# Altium PCB ChronomePCBV2.PcbDoc (part 2 of 2)
Units mil, origin at the board's own origin, x right, y up, seen from the top; angles counter-clockwise.
Board outline 8700 x 8700 mil, 2 copper layers (Top Layer, Bottom Layer); 149 components, 168 nets, 771 pads, 312 vias.
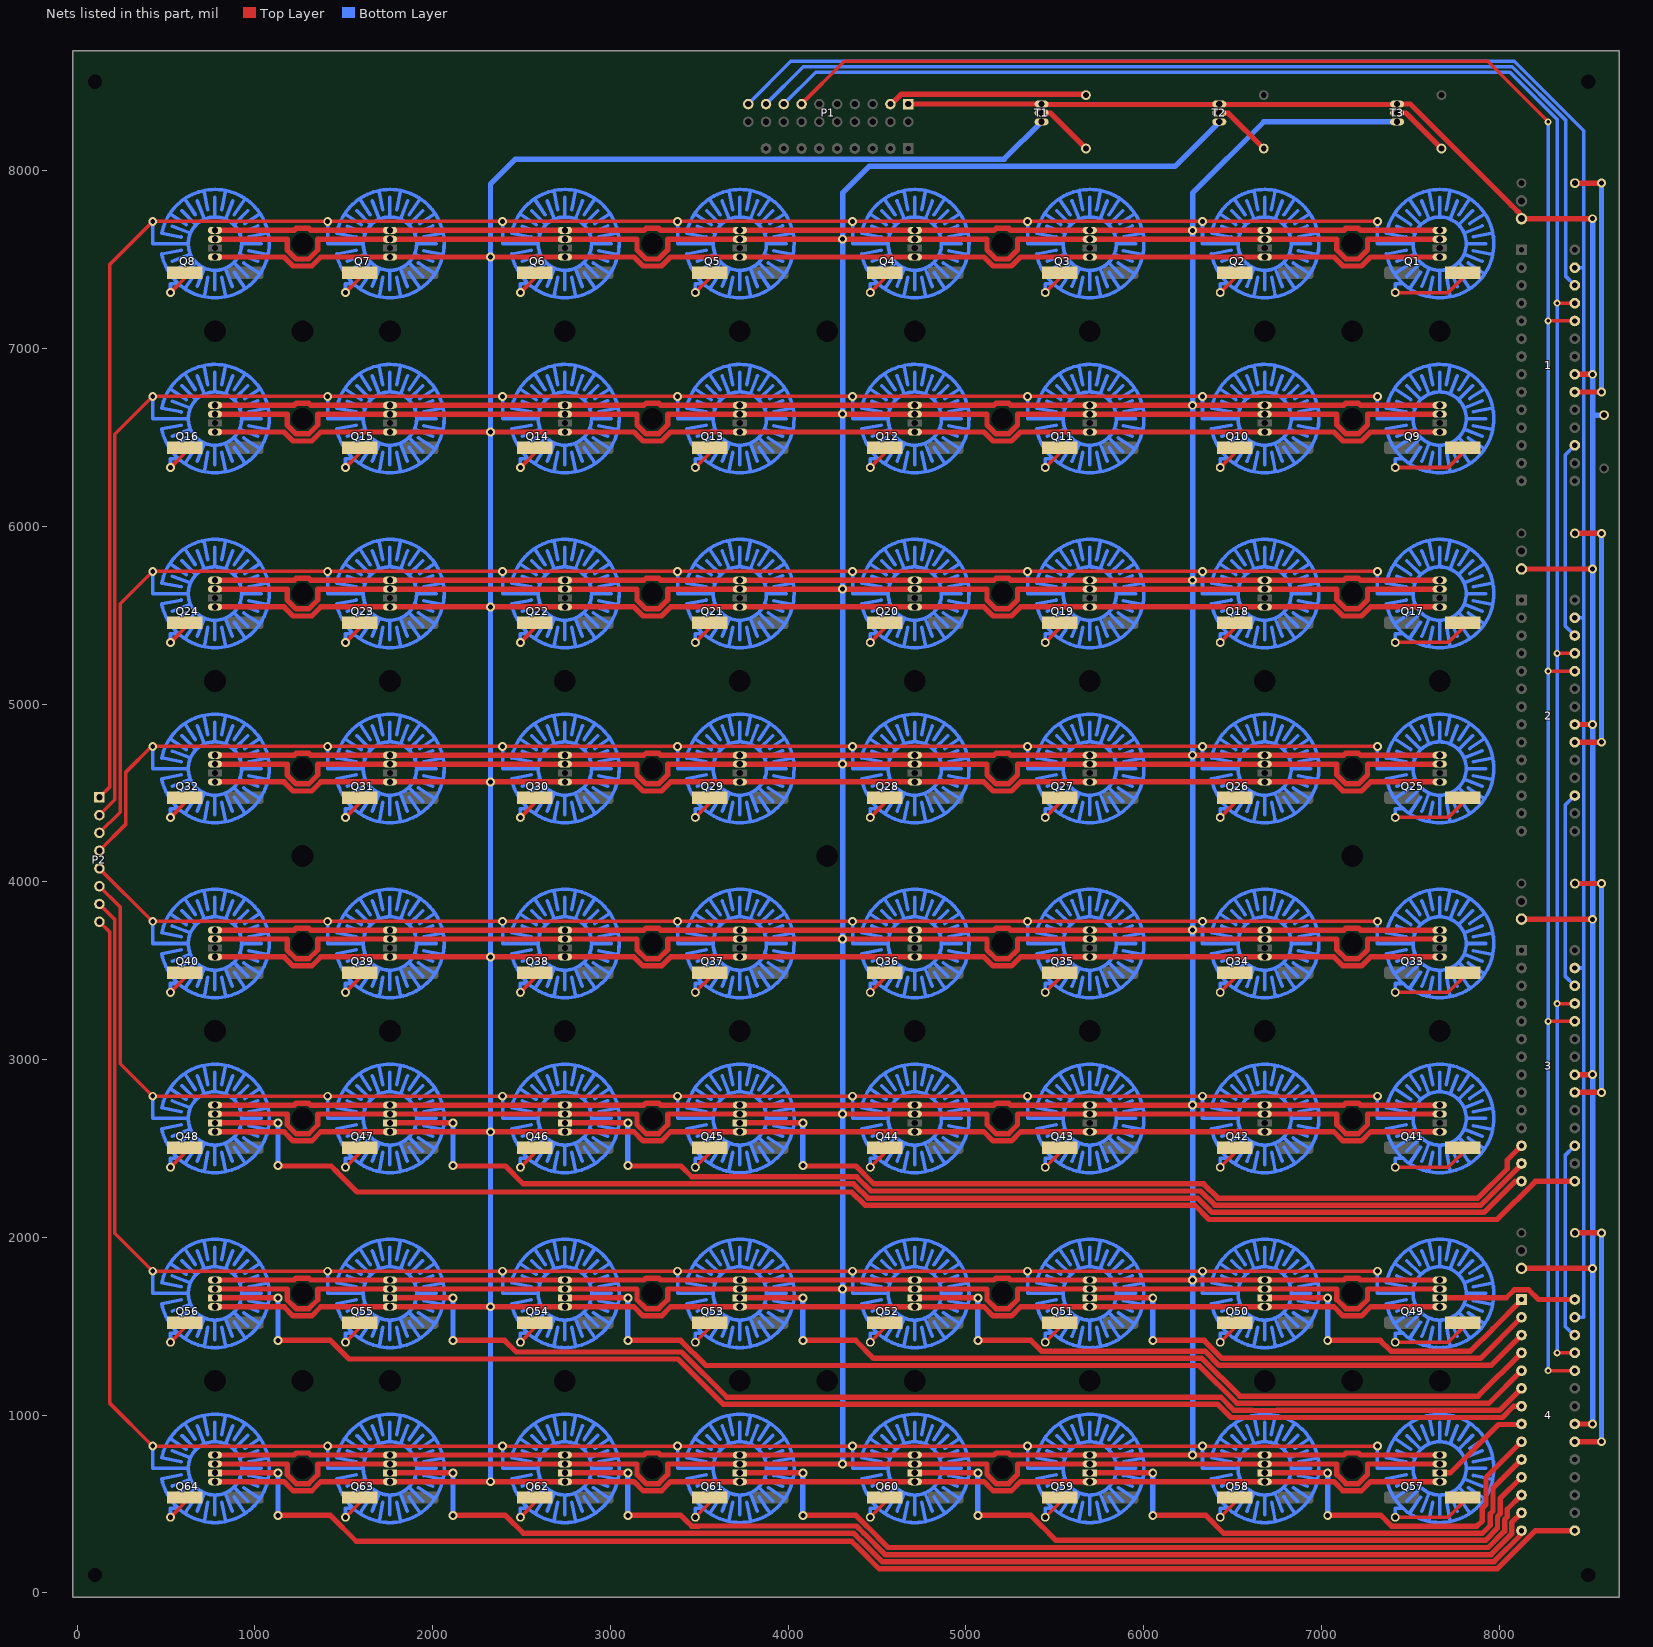
[diagram p2: the nets of this part, all layers, seen from the top]

## Via types
v1: diameter 50, hole 28, Top Layer to Bottom Layer, 292 vias
v2: diameter 40, hole 20, Top Layer to Bottom Layer, 20 vias

## Nets (pads, with @x,y where several pads share a name; then routed paths per layer and width w, separated by ;. In a path a pad name is that pad's centre, name@x,y a point inside that pad or via, vN(x,y) a via of type N, cw(c..) or ccw(c..) an arc to the next point about the centre after c; other vN are vias at no path point) (continued)
"LED GND 45": 3.12 Q45.1 | length 4862.9
  Top Layer w30: Q45.1@3727.76,2643.5 v1(4082.24,2643.5) ; v1@4082.24,2400.75 4381.06,2400.75 4481.3,2300.51 6336.66,2300.51 6416.66,2220.51 7880.51,2220.51 8045,2385 8045,2435 3.12@8125,2515
  Bottom Layer w30: v1(4082.24,2403.74) v1(4082.24,2643.5)
"LED GND 46": 3.13 Q46.1 | length 5813.5
  Top Layer w30: Q46.1@2743.5,2643.5 v1(3097.99,2643.5) ; v1@3097.99,2400.75 3396.81,2400.75 3457.05,2340.51 4384.73,2340.51 4464.73,2260.51 6320.1,2260.51 6400.1,2180.51 7897.08,2180.51 8125,2408.43 3.13@8125,2415
  Bottom Layer w30: v1(3097.99,2403.74) v1(3097.99,2643.5)
"LED GND 47": 3.14 Q47.1 | length 6785.6
  Top Layer w30: Q47.1@1759.25,2643.5 v1(2113.74,2643.5) ; v1@2113.74,2400.75 2409.25,2400.75 2509.49,2300.51 4368.16,2300.51 4448.16,2220.51 6303.53,2220.51 6383.53,2140.51 7913.65,2140.51 8088.14,2315 3.14@8125,2315
  Bottom Layer w30: v1(2113.74,2403.74) v1(2113.74,2643.5)
"LED GND 48": 3.15 Q48.1 | length 8102.6
  Top Layer w30: Q48.1@775,2643.5 v1(1129.49,2643.5) ; v1@1129.49,2400.75 1429.25,2400.75 1459.25,2370.75 ; 1459.25,2369.8 1574.05,2255 4357.1,2255 4431.59,2180.51 6286.96,2180.51 6366.96,2100.51 7988.29,2100.51 8202.78,2315 3.15@8425,2315
  Bottom Layer w30: v1(1129.49,2403.74) v1(1129.49,2643.5)
"LED GND 49": 4.28 Q49.1 | length 801.8
  Top Layer w30: Q49.1@7664.76,1659.76 8039.41,1659.76 8084.64,1705 8165.36,1705 8220.36,1650 4.28@8425,1650
"LED GND 50": 4.1 Q50.1 | length 1828.9
  Top Layer w30: Q50.1@6680.51,1659.25 v1(7035,1659.25) ; v1@7035,1420 7330,1420 7390.75,1359.25 7837.87,1359.25 7963.76,1485.15 7963.76,1485.66 4.1@8125,1646.9
  Bottom Layer w30: v1(7035,1419.49) v1(7035,1659.25)
"LED GND 51": 4.2 Q51.1 | length 2805.8
  Top Layer w30: Q51.1@5696.26,1659.25 v1(6050.75,1659.25) ; v1@6050.75,1420 6340,1420 6440.75,1319.25 7894.25,1319.25 4.2@8125,1550
  Bottom Layer w30: v1(6050.75,1419.49) v1(6050.75,1659.25)
"LED GND 52": 4.3 Q52.1 | length 3782.1
  Top Layer w30: Q52.1@4712.01,1659.25 v1(5066.5,1659.25) ; v1@5066.5,1420 5365.31,1420 5396.26,1389.05 5396.26,1388.54 5425.55,1359.25 6344.18,1359.25 6424.18,1279.25 7954.25,1279.25 4.3@8125,1450
  Bottom Layer w30: v1(5066.5,1419.49) v1(5066.5,1659.25)
"LED GND 53": 4.4 Q53.1 | length 4868.8
  Top Layer w30: Q53.1@3727.76,1659.25 v1(4082.24,1659.25) ; v1@4082.24,1420 4380,1420 4480.75,1319.25 6327.61,1319.25 6540.37,1106.49 6644.37,1106.49 6644.88,1105.98 6716.14,1105.98 6716.66,1106.49 7136.62,1106.49 7137.01,1106.1 7208.27,1106.1 7208.66,1106.49 7628.75,1106.49 7629.13,1106.1 7700.4,1106.1 7700.78,1106.49 7881.49,1106.49 4.4@8125,1350
  Bottom Layer w30: v1(4082.24,1419.49) v1(4082.24,1659.25)
"LED GND 54": 4.5 Q54.1 | length 5844.8
  Top Layer w30: Q54.1@2743.5,1659.25 v1(3097.99,1659.25) ; v1@3097.99,1420 3395,1420 3536.34,1278.66 6311.63,1278.66 6523.81,1066.49 6627.8,1066.49 6628.31,1065.98 6732.71,1065.98 6733.22,1066.49 7120.05,1066.49 7120.44,1066.1 7224.84,1066.1 7225.22,1066.49 7612.18,1066.49 7612.56,1066.1 7716.96,1066.1 7717.35,1066.49 7941.49,1066.49 4.5@8125,1250
  Bottom Layer w30: v1(3097.99,1419.49) v1(3097.99,1659.25)
"LED GND 55": 4.6 Q55.1 | length 6820.7
  Top Layer w30: Q55.1@1759.25,1659.25 v1(2113.74,1659.25) ; v1@2113.74,1420 2405,1420 2470,1355 3400,1355 3655,1100 6433.73,1100 6507.24,1026.49 6611.23,1026.49 6611.74,1025.98 6749.28,1025.98 6749.79,1026.49 7103.48,1026.49 7103.87,1026.1 7241.41,1026.1 7241.79,1026.49 7595.61,1026.49 7595.99,1026.1 7733.53,1026.1 7733.92,1026.49 8001.49,1026.49 4.6@8125,1150
  Bottom Layer w30: v1(2113.74,1419.49) v1(2113.74,1659.25)
"LED GND 56": 4.7 Q56.1 | length 7796.7
  Top Layer w30: Q56.1@775,1659.25 v1(1129.49,1659.25) ; v1@1129.49,1420 1425,1420 1530,1315 3380,1315 3635,1060 6417.16,1060 6490.67,986.49 6498.51,986.49 6594.66,986.49 6595.17,985.98 6765.85,985.98 6766.36,986.49 7086.91,986.49 7087.3,986.1 7257.98,986.1 7258.36,986.49 7579.04,986.49 7579.43,986.1 7750.1,986.1 7750.49,986.49 8018.06,986.49 8081.57,1050 4.7@8125,1050
  Bottom Layer w30: v1(1129.49,1419.49) v1(1129.49,1659.25)
"LED GND 57": 4.8 Q57.1 | length 569.2
  Top Layer w30: Q57.1@7664.76,675 7724.25,675 7995.74,946.49 4.8@8121.49,946.49
"LED GND 58": 4.9 Q58.1 | length 2038.5
  Top Layer w30: Q58.1@6680.51,675 v1(7035,675) ; v1@7035,435.75 7334.25,435.75 7364.76,405.24 7364.76,404.29 7394.05,375 7875,375 7905,405 7905,476.64 7925,496.64 7925,650 4.9@8125,850
  Bottom Layer w30: v1(7035,435.24) v1(7035,675)
"LED GND 59": 4.10 Q59.1 | length 2996.3
  Top Layer w30: Q59.1@5696.26,675 v1(6050.75,675) ; v1@6050.75,435.75 6349.05,435.75 6449.8,335 7904.94,335 7950,380.06 7950,444.71 7965,459.71 7965,590 4.10@8125,750
  Bottom Layer w30: v1(6050.75,435.24) v1(6050.75,675)
"LED GND 60": 4.11 Q60.1 | length 3947.2
  Top Layer w30: Q60.1@4712.01,675 v1(5066.5,675) ; v1@5066.5,435.75 5365.31,435.75 5396.26,404.8 5396.26,404.29 5425.55,375 5426.06,375 5506.06,295 7921.51,295 7990,363.49 7990,428.14 8005,443.14 8005,530 4.11@8125,650
  Bottom Layer w30: v1(5066.5,435.24) v1(5066.5,675)
"LED GND 61": 4.12 Q61.1 | length 4897.7
  Top Layer w30: Q61.1@3727.76,675 v1(4082.24,675) ; v1@4082.24,435.75 4381.06,435.75 4412.01,404.8 4412.01,404.29 4441.3,375 4441.81,375 4561.81,255 7938.08,255 8030,346.92 8030,411.57 8045,426.57 8045,470 4.12@8125,550
  Bottom Layer w30: v1(4082.24,435.24) v1(4082.24,675)
"LED GND 62": 4.13 Q62.1 | length 5848.6
  Top Layer w30: Q62.1@2743.5,675 v1(3097.99,675) ; v1@3097.99,435.75 3396.81,435.75 3427.76,404.8 3427.76,404.29 3457.05,375 3498.47,375 3498.98,375.51 4384.22,375.51 4424.73,335 4425.24,335 4545.24,215 7954.64,215 8070,330.36 8070,395 4.13@8125,450
  Bottom Layer w30: v1(3097.99,435.24) v1(3097.99,675)
"LED GND 63": 4.14 Q63.1 | length 6798.9
  Top Layer w30: Q63.1@1759.25,675 v1(2113.74,675) ; v1@2113.74,435.75 2409.25,435.75 2509.49,335.51 3439.97,335.51 3440.48,335 3515.03,335 3515.55,335.51 4367.65,335.51 4408.16,295 4408.67,295 4528.67,175 7971.21,175 8123.76,327.55 8123.76,330.63 8125,331.86 4.14@8125,350
  Bottom Layer w30: v1(2113.74,435.24) v1(2113.74,675)
"LED GND 64": 4.15 Q64.1 | length 8103.4
  Top Layer w30: Q64.1@775,675 v1(1129.49,675) ; v1@1129.49,435.75 1185,435.75 1424.25,435.75 1570,290 4356.59,290 4391.59,255 4392.1,255 4512.1,135 7987.78,135 8202.78,350 4.15@8425,350
  Bottom Layer w30: v1(1129.49,435.24) v1(1129.49,675)
Net1_17: 1.17 2.26 | length 1115.6
  Bottom Layer w20: 2.26@8425,5385 8370,5440 8370,6400 1.17@8425,6455
Net1_20: 1.20 R4.1 | length 1475
  Top Layer w30: 1.20@8425,6755 v1(8575,6755) ; R4.1@8425,7930 v1(8575,7930)
  Bottom Layer w30: v1(8575,6755) v1(8575,7930)
Net2_17: 2.17 3.26 | length 1115.6
  Bottom Layer w20: 3.26@8425,3415 8370,3470 8370,4430 2.17@8425,4485
Net2_20: 2.20 R5.1 | length 1475
  Top Layer w30: 2.20@8425,4785 v1(8575,4785) ; R5.1@8425,5960 v1(8575,5960)
  Bottom Layer w30: v1(8575,4785) v1(8575,5960)
Net3_17: 3.17 4.26 | length 1115.6
  Bottom Layer w20: 4.26@8425,1445 8370,1500 8370,2460 3.17@8425,2515
Net3_20: 3.20 R6.1 | length 1475
  Top Layer w30: 3.20@8425,2815 v1(8575,2815) ; R6.1@8425,3990 v1(8575,3990)
  Bottom Layer w30: v1(8575,2815) v1(8575,3990)
Net4_20: 4.20 R7.1 | length 1475
  Top Layer w30: 4.20@8425,850 v1(8575,850) ; R7.1@8425,2025 v1(8575,2025)
  Bottom Layer w30: v1(8575,850) v1(8575,2025)
NetD1_0: D1.0 Q1.Out | length 455.2
  Top Layer w20: Q1.Out@7414.76,7314.76 7713,7314.76 D1.0@7824,7425.76
NetD2_0: D2.0 Q2.Out | length 144.6
  Top Layer w20: Q2.Out@6430.51,7314.76 6511.51,7395.76 D2.0@6511.51,7425.76
NetD3_0: D3.0 Q3.Out | length 144.6
  Top Layer w20: Q3.Out@5446.26,7314.76 5527.26,7395.76 D3.0@5527.26,7425.76
NetD4_0: D4.0 Q4.Out | length 144.6
  Top Layer w20: Q4.Out@4462.01,7314.76 4543.01,7395.76 D4.0@4543.01,7425.76
NetD5_0: D5.0 Q5.Out | length 144.6
  Top Layer w20: Q5.Out@3477.76,7314.76 3558.76,7395.76 D5.0@3558.76,7425.76
NetD6_0: D6.0 Q6.Out | length 144.6
  Top Layer w20: Q6.Out@2493.5,7314.76 2574.5,7395.76 D6.0@2574.5,7425.76
NetD7_0: D7.0 Q7.Out | length 144.6
  Top Layer w20: Q7.Out@1509.25,7314.76 1590.25,7395.76 D7.0@1590.25,7425.76
NetD8_0: D8.0 Q8.Out | length 144.6
  Top Layer w20: Q8.Out@525,7314.76 606,7395.76 D8.0@606,7425.76
NetD9_0: D9.0 Q9.Out | length 455.2
  Top Layer w20: Q9.Out@7414.76,6330.51 7713,6330.51 D9.0@7824,6441.51
NetD10_0: D10.0 Q10.Out | length 144.6
  Top Layer w20: Q10.Out@6430.51,6330.51 6511.51,6411.51 D10.0@6511.51,6441.51
NetD11_0: D11.0 Q11.Out | length 144.6
  Top Layer w20: Q11.Out@5446.26,6330.51 5527.26,6411.51 D11.0@5527.26,6441.51
NetD12_0: D12.0 Q12.Out | length 144.6
  Top Layer w20: Q12.Out@4462.01,6330.51 4543.01,6411.51 D12.0@4543.01,6441.51
NetD13_0: D13.0 Q13.Out | length 144.6
  Top Layer w20: Q13.Out@3477.76,6330.51 3558.76,6411.51 D13.0@3558.76,6441.51
NetD14_0: D14.0 Q14.Out | length 144.6
  Top Layer w20: Q14.Out@2493.5,6330.51 2574.5,6411.51 D14.0@2574.5,6441.51
NetD15_0: D15.0 Q15.Out | length 144.6
  Top Layer w20: Q15.Out@1509.25,6330.51 1590.25,6411.51 D15.0@1590.25,6441.51
NetD16_0: D16.0 Q16.Out | length 144.6
  Top Layer w20: Q16.Out@525,6330.51 606,6411.51 D16.0@606,6441.51
NetD17_0: D17.0 Q17.Out | length 455.2
  Top Layer w20: Q17.Out@7414.76,5346.26 7713,5346.26 D17.0@7824,5457.26
NetD18_0: D18.0 Q18.Out | length 144.6
  Top Layer w20: Q18.Out@6430.51,5346.26 6511.51,5427.26 D18.0@6511.51,5457.26
NetD19_0: D19.0 Q19.Out | length 144.6
  Top Layer w20: Q19.Out@5446.26,5346.26 5527.26,5427.26 D19.0@5527.26,5457.26
NetD20_0: D20.0 Q20.Out | length 144.6
  Top Layer w20: Q20.Out@4462.01,5346.26 4543.01,5427.26 D20.0@4543.01,5457.26
NetD21_0: D21.0 Q21.Out | length 144.6
  Top Layer w20: Q21.Out@3477.76,5346.26 3558.76,5427.26 D21.0@3558.76,5457.26
NetD22_0: D22.0 Q22.Out | length 144.6
  Top Layer w20: Q22.Out@2493.5,5346.26 2574.5,5427.26 D22.0@2574.5,5457.26
NetD23_0: D23.0 Q23.Out | length 144.6
  Top Layer w20: Q23.Out@1509.25,5346.26 1590.25,5427.26 D23.0@1590.25,5457.26
NetD24_0: D24.0 Q24.Out | length 144.6
  Top Layer w20: Q24.Out@525,5346.26 606,5427.26 D24.0@606,5457.26
NetD25_0: D25.0 Q25.Out | length 455.2
  Top Layer w20: Q25.Out@7414.76,4362.01 7713,4362.01 D25.0@7824,4473.01
NetD26_0: D26.0 Q26.Out | length 144.6
  Top Layer w20: Q26.Out@6430.51,4362.01 6511.51,4443.01 D26.0@6511.51,4473.01
NetD27_0: D27.0 Q27.Out | length 144.6
  Top Layer w20: Q27.Out@5446.26,4362.01 5527.26,4443.01 D27.0@5527.26,4473.01
NetD28_0: D28.0 Q28.Out | length 144.6
  Top Layer w20: Q28.Out@4462.01,4362.01 4543.01,4443.01 D28.0@4543.01,4473.01
NetD29_0: D29.0 Q29.Out | length 144.6
  Top Layer w20: Q29.Out@3477.76,4362.01 3558.76,4443.01 D29.0@3558.76,4473.01
NetD30_0: D30.0 Q30.Out | length 144.6
  Top Layer w20: Q30.Out@2493.5,4362.01 2574.5,4443.01 D30.0@2574.5,4473.01
NetD31_0: D31.0 Q31.Out | length 144.6
  Top Layer w20: Q31.Out@1509.25,4362.01 1590.25,4443.01 D31.0@1590.25,4473.01
NetD32_0: D32.0 Q32.Out | length 144.6
  Top Layer w20: Q32.Out@525,4362.01 606,4443.01 D32.0@606,4473.01
NetD33_0: D33.0 Q33.Out | length 455.2
  Top Layer w20: Q33.Out@7414.76,3377.76 7713,3377.76 D33.0@7824,3488.76
NetD34_0: D34.0 Q34.Out | length 144.6
  Top Layer w20: Q34.Out@6430.51,3377.76 6511.51,3458.76 D34.0@6511.51,3488.76
NetD35_0: D35.0 Q35.Out | length 144.6
  Top Layer w20: Q35.Out@5446.26,3377.76 5527.26,3458.76 D35.0@5527.26,3488.76
NetD36_0: D36.0 Q36.Out | length 144.6
  Top Layer w20: Q36.Out@4462.01,3377.76 4543.01,3458.76 D36.0@4543.01,3488.76
NetD37_0: D37.0 Q37.Out | length 144.6
  Top Layer w20: Q37.Out@3477.76,3377.76 3558.76,3458.76 D37.0@3558.76,3488.76
NetD38_0: D38.0 Q38.Out | length 144.6
  Top Layer w20: Q38.Out@2493.5,3377.76 2574.5,3458.76 D38.0@2574.5,3488.76
NetD39_0: D39.0 Q39.Out | length 144.6
  Top Layer w20: Q39.Out@1509.25,3377.76 1590.25,3458.76 D39.0@1590.25,3488.76
NetD40_0: D40.0 Q40.Out | length 144.6
  Top Layer w20: Q40.Out@525,3377.76 606,3458.76 D40.0@606,3488.76
NetD41_0: D41.0 Q41.Out | length 455.2
  Top Layer w20: Q41.Out@7414.76,2393.5 7713,2393.5 D41.0@7824,2504.5
NetD42_0: D42.0 Q42.Out | length 144.6
  Top Layer w20: Q42.Out@6430.51,2393.5 6511.51,2474.5 D42.0@6511.51,2504.5
NetD43_0: D43.0 Q43.Out | length 144.6
  Top Layer w20: Q43.Out@5446.26,2393.5 5527.26,2474.5 D43.0@5527.26,2504.5
NetD44_0: D44.0 Q44.Out | length 144.6
  Top Layer w20: Q44.Out@4462.01,2393.5 4543.01,2474.5 D44.0@4543.01,2504.5
NetD45_0: D45.0 Q45.Out | length 144.6
  Top Layer w20: Q45.Out@3477.76,2393.5 3558.76,2474.5 D45.0@3558.76,2504.5
NetD46_0: D46.0 Q46.Out | length 144.6
  Top Layer w20: Q46.Out@2493.5,2393.5 2574.5,2474.5 D46.0@2574.5,2504.5
NetD47_0: D47.0 Q47.Out | length 144.6
  Top Layer w20: Q47.Out@1509.25,2393.5 1590.25,2474.5 D47.0@1590.25,2504.5
NetD48_0: D48.0 Q48.Out | length 144.6
  Top Layer w20: Q48.Out@525,2393.5 606,2474.5 D48.0@606,2504.5
NetD49_0: D49.0 Q49.Out | length 455.2
  Top Layer w20: Q49.Out@7414.76,1409.25 7713,1409.25 D49.0@7824,1520.25
NetD50_0: D50.0 Q50.Out | length 144.6
  Top Layer w20: Q50.Out@6430.51,1409.25 6511.51,1490.25 D50.0@6511.51,1520.25
NetD51_0: D51.0 Q51.Out | length 144.6
  Top Layer w20: Q51.Out@5446.26,1409.25 5527.26,1490.25 D51.0@5527.26,1520.25
NetD52_0: D52.0 Q52.Out | length 144.6
  Top Layer w20: Q52.Out@4462.01,1409.25 4543.01,1490.25 D52.0@4543.01,1520.25
NetD53_0: D53.0 Q53.Out | length 144.6
  Top Layer w20: Q53.Out@3477.76,1409.25 3558.76,1490.25 D53.0@3558.76,1520.25
NetD54_0: D54.0 Q54.Out | length 144.6
  Top Layer w20: Q54.Out@2493.5,1409.25 2574.5,1490.25 D54.0@2574.5,1520.25
NetD55_0: D55.0 Q55.Out | length 144.6
  Top Layer w20: Q55.Out@1509.25,1409.25 1590.25,1490.25 D55.0@1590.25,1520.25
NetD56_0: D56.0 Q56.Out | length 144.6
  Top Layer w20: Q56.Out@525,1409.25 606,1490.25 D56.0@606,1520.25
NetD57_0: pad.0@7794,536 Q57.Out | length 455.2
  Top Layer w20: Q57.Out@7414.76,425 7713,425 pad.0@7824,536
NetD58_0: D58.0 Q58.Out | length 144.6
  Top Layer w20: Q58.Out@6430.51,425 6511.51,506 D58.0@6511.51,536
NetD59_0: D59.0 Q59.Out | length 144.6
  Top Layer w20: Q59.Out@5446.26,425 5527.26,506 D59.0@5527.26,536
NetD60_0: D60.0 Q60.Out | length 144.6
  Top Layer w20: Q60.Out@4462.01,425 4543.01,506 D60.0@4543.01,536
NetD61_0: D61.0 Q61.Out | length 144.6
  Top Layer w20: Q61.Out@3477.76,425 3558.76,506 D61.0@3558.76,536
NetD62_0: D62.0 Q62.Out | length 144.6
  Top Layer w20: Q62.Out@2493.5,425 2574.5,506 D62.0@2574.5,536
NetD63_0: D63.0 Q63.Out | length 144.6
  Top Layer w20: Q63.Out@1509.25,425 1590.25,506 D63.0@1590.25,536
NetD64_0: D64.0 Q64.Out | length 144.6
  Top Layer w20: Q64.Out@525,425 606,506 D64.0@606,536
NetP2_1: P2.1 Q1.In Q2.In Q3.In Q4.In Q5.In Q6.In Q7.In Q8.In | length 10253.8
  Top Layer w20: P2.1@125,4475 182,4532 182,7471.76 v1(425,7714.76) v1(1409.25,7714.76) v1(2393.5,7714.76) v1(3377.76,7714.76) v1(4362.01,7714.76) v1(5346.26,7714.76) v1(6330.51,7714.76) v1(7314.76,7714.76)
NetP2_2: P2.2 Q9.In Q10.In Q11.In Q12.In Q13.In Q14.In Q15.In Q16.In | length 9369.5
  Top Layer w20: P2.2@125,4375 212,4462 212,6517.51 v1(425,6730.51) v1(1409.25,6730.51) v1(2393.5,6730.51) v1(3377.76,6730.51) v1(4362.01,6730.51) v1(5346.26,6730.51) v1(6330.51,6730.51) v1(7314.76,6730.51)
NetP2_3: P2.3 Q17.In Q18.In Q19.In Q20.In Q21.In Q22.In Q23.In Q24.In | length 8485.3
  Top Layer w20: P2.3@125,4275 242,4392 242,5563.26 v1(425,5746.26) v1(1409.25,5746.26) v1(2393.5,5746.26) v1(3377.76,5746.26) v1(4362.01,5746.26) v1(5346.26,5746.26) v1(6330.51,5746.26) v1(7314.76,5746.26)
NetP2_4: P2.4 Q25.In Q26.In Q27.In Q28.In Q29.In Q30.In Q31.In Q32.In | length 7604.5
  Top Layer w20: P2.4@125,4175 272,4322 272,4615 419.01,4762.01 v1(1409.25,4762.01) v1(2393.5,4762.01) v1(3377.76,4762.01) v1(4362.01,4762.01) v1(5346.26,4762.01) v1(6330.51,4762.01) v1(7314.76,4762.01)
  other v1: 425,4762.01
NetP2_5: P2.5 Q33.In Q34.In Q35.In Q36.In Q37.In Q38.In Q39.In Q40.In | length 7312.9
  Top Layer w20: P2.5@125,4075 422.24,3777.76 v1(1409.25,3777.76) v1(2393.5,3777.76) v1(3377.76,3777.76) v1(4362.01,3777.76) v1(5346.26,3777.76) v1(6330.51,3777.76) v1(7314.76,3777.76)
  other v1: 425,3777.76
NetP2_6: P2.6 Q41.In Q42.In Q43.In Q44.In Q45.In Q46.In Q47.In Q48.In | length 8195.5
  Top Layer w20: P2.6@125,3975 242,3858 242,2976.5 v1(425,2793.5) v1(1409.25,2793.5) v1(2393.5,2793.5) v1(3377.76,2793.5) v1(4362.01,2793.5) v1(5346.26,2793.5) v1(6330.51,2793.5) v1(7314.76,2793.5)
NetP2_7: P2.7 Q49.In Q50.In Q51.In Q52.In Q53.In Q54.In Q55.In Q56.In | length 9079.8
  Top Layer w20: P2.7@125,3875 212,3788 212,2022.25 v1(425,1809.25) v1(1409.25,1809.25) v1(2393.5,1809.25) v1(3377.76,1809.25) v1(4362.01,1809.25) v1(5346.26,1809.25) v1(6330.51,1809.25) v1(7314.76,1809.25)
NetP2_8: P2.8 Q57.In Q58.In Q59.In Q60.In Q61.In Q62.In Q63.In Q64.In | length 9964
  Top Layer w20: P2.8@125,3775 182,3718 182,1068 v1(425,825) v1(1409.25,825) v1(2393.5,825) v1(3377.76,825) v1(4362.01,825) v1(5346.26,825) v1(6330.51,825) v1(7314.76,825)
NetQ1_0: Q1.0 Q2.0 Q3.0 Q4.0 Q5.0 Q6.0 Q7.0 Q8.0 Q9.0 Q10.0 Q11.0 Q12.0 Q13.0 Q14.0 Q15.0 Q16.0 Q17.0 Q18.0 Q19.0 Q20.0 Q21.0 Q22.0 Q23.0 Q24.0 Q25.0 Q26.0 Q27.0 Q28.0 Q29.0 Q30.0 Q31.0 Q32.0 Q33.0 Q34.0 Q35.0 Q36.0 Q37.0 Q38.0 Q39.0 Q40.0 Q41.0 Q42.0 Q43.0 Q44.0 Q45.0 Q46.0 Q47.0 Q48.0 Q49.0 Q50.0 Q51.0 Q52.0 Q53.0 Q54.0 Q55.0 Q56.0 Q57.0 Q58.0 Q59.0 Q60.0 Q61.0 Q62.0 Q63.0 Q64.0 T1.3 | length 67015.7
  Top Layer w30: Q64.0@775,625 1163.9,625 1214.93,573.98 1319.33,573.98 1370.35,625 Q63.0@1759.25,625 Q62.0@2743.5,625 3132.41,625 3183.43,573.98 3287.83,573.98 3338.85,625 Q61.0@3727.76,625 Q60.0@4712.01,625 5100.91,625 5151.93,573.98 5256.33,573.98 5307.36,625 Q59.0@5696.26,625 Q58.0@6680.51,625 7069.41,625 7120.44,573.98 7224.84,573.98 7275.86,625 Q57.0@7664.76,625 ; Q56.0@775,1609.25 1163.9,1609.25 1214.93,1558.23 1319.33,1558.23 1370.35,1609.25 Q55.0@1759.25,1609.25 Q54.0@2743.5,1609.25 3132.41,1609.25 3183.43,1558.23 3287.83,1558.23 3338.85,1609.25 Q53.0@3727.76,1609.25 Q52.0@4712.01,1609.25 5100.91,1609.25 5151.93,1558.23 5256.33,1558.23 5307.36,1609.25 Q51.0@5696.26,1609.25 Q50.0@6680.51,1609.25 7069.41,1609.25 7120.44,1558.23 7224.84,1558.23 7275.86,1609.25 Q49.0@7664.76,1609.25 ; Q48.0@775,2593.5 1163.9,2593.5 1214.93,2542.48 1319.33,2542.48 1370.35,2593.5 Q47.0@1759.25,2593.5 Q46.0@2743.5,2593.5 3132.41,2593.5 3183.43,2542.48 3287.83,2542.48 3338.85,2593.5 Q45.0@3727.76,2593.5 Q44.0@4712.01,2593.5 5100.91,2593.5 5151.93,2542.48 5256.33,2542.48 5307.36,2593.5 Q43.0@5696.26,2593.5 Q42.0@6680.51,2593.5 7069.41,2593.5 7120.44,2542.48 7224.84,2542.48 7275.86,2593.5 Q41.0@7664.76,2593.5 ; Q40.0@775,3577.76 1163.9,3577.76 1214.93,3526.73 1319.33,3526.73 1370.35,3577.76 Q39.0@1759.25,3577.76 Q38.0@2743.5,3577.76 3132.41,3577.76 3183.43,3526.73 3287.83,3526.73 3338.85,3577.76 Q37.0@3727.76,3577.76 Q36.0@4712.01,3577.76 5100.91,3577.76 5151.93,3526.73 5256.33,3526.73 5307.36,3577.76 Q35.0@5696.26,3577.76 Q34.0@6680.51,3577.76 7069.41,3577.76 7120.44,3526.73 7224.84,3526.73 7275.86,3577.76 Q33.0@7664.76,3577.76 ; Q32.0@775,4562.01 1163.9,4562.01 1214.93,4510.98 1319.33,4510.98 1370.35,4562.01 Q31.0@1759.25,4562.01 Q30.0@2743.5,4562.01 3132.41,4562.01 3183.43,4510.98 3287.83,4510.98 3338.85,4562.01 Q29.0@3727.76,4562.01 Q28.0@4712.01,4562.01 5100.91,4562.01 5151.93,4510.98 5256.33,4510.98 5307.36,4562.01 Q27.0@5696.26,4562.01 Q26.0@6680.51,4562.01 7069.41,4562.01 7120.44,4510.98 7224.84,4510.98 7275.86,4562.01 Q25.0@7664.76,4562.01 ; Q24.0@775,5546.26 1163.9,5546.26 1214.93,5495.24 1319.33,5495.24 1370.35,5546.26 Q23.0@1759.25,5546.26 Q22.0@2743.5,5546.26 3132.41,5546.26 3183.43,5495.24 3287.83,5495.24 3338.85,5546.26 Q21.0@3727.76,5546.26 Q20.0@4712.01,5546.26 5100.91,5546.26 5151.93,5495.24 5256.33,5495.24 5307.36,5546.26 Q19.0@5696.26,5546.26 Q18.0@6680.51,5546.26 7069.41,5546.26 7120.44,5495.24 7224.84,5495.24 7275.86,5546.26 Q17.0@7664.76,5546.26 ; Q16.0@775,6530.51 1163.9,6530.51 1214.93,6479.49 1319.33,6479.49 1370.35,6530.51 Q15.0@1759.25,6530.51 Q14.0@2743.5,6530.51 3132.41,6530.51 3183.43,6479.49 3287.83,6479.49 3338.85,6530.51 Q13.0@3727.76,6530.51 Q12.0@4712.01,6530.51 5100.91,6530.51 5151.93,6479.49 5256.33,6479.49 5307.36,6530.51 Q11.0@5696.26,6530.51 Q10.0@6680.51,6530.51 7069.41,6530.51 7120.44,6479.49 7224.84,6479.49 7275.86,6530.51 Q9.0@7664.76,6530.51 ; Q8.0@775,7514.76 1163.9,7514.76 1214.93,7463.74 1319.33,7463.74 1370.35,7514.76 Q7.0@1759.25,7514.76 Q6.0@2743.5,7514.76 3132.41,7514.76 3183.43,7463.74 3287.83,7463.74 3338.85,7514.76 Q5.0@3727.76,7514.76 Q4.0@4712.01,7514.76 5100.91,7514.76 5151.93,7463.74 5256.33,7463.74 5307.36,7514.76 Q3.0@5696.26,7514.76 Q2.0@6680.51,7514.76 7069.41,7514.76 7120.44,7463.74 7224.84,7463.74 7275.86,7514.76 Q1.0@7664.76,7514.76
  Bottom Layer w30: v1(2325,625) 2325,7925 2465,8065 5215,8065 T1.3@5425,8275
  other v1: 2325,1609.25 2325,2593.5 2325,3577.76 2325,4562.01 2325,5546.26 2325,6530.51 2325,7514.76
NetQ1_2: Q1.2 Q2.2 Q3.2 Q4.2 Q5.2 Q6.2 Q7.2 Q8.2 Q9.2 Q10.2 Q11.2 Q12.2 Q13.2 Q14.2 Q15.2 Q16.2 Q17.2 Q18.2 Q19.2 Q20.2 Q21.2 Q22.2 Q23.2 Q24.2 Q25.2 Q26.2 Q27.2 Q28.2 Q29.2 Q30.2 Q31.2 Q32.2 Q33.2 Q34.2 Q35.2 Q36.2 Q37.2 Q38.2 Q39.2 Q40.2 Q41.2 Q42.2 Q43.2 Q44.2 Q45.2 Q46.2 Q47.2 Q48.2 Q49.2 Q50.2 Q51.2 Q52.2 Q53.2 Q54.2 Q55.2 Q56.2 Q57.2 Q58.2 Q59.2 Q60.2 Q61.2 Q62.2 Q63.2 Q64.2 T2.3 | length 69769.2
  Top Layer w30: Q64.2@775,725 1181.1,725 1181.1,664.37 1231.49,613.98 1302.76,613.98 1353.15,664.37 1353.15,725 Q63.2@1759.25,725 Q62.2@2743.5,725 3149.61,725 3149.61,664.37 3200,613.98 3271.26,613.98 3321.65,664.37 3321.65,725 Q61.2@3727.76,725 Q60.2@4712.01,725 5118.11,725 5118.11,664.37 5168.5,613.98 5239.77,613.98 5290.16,664.37 5290.16,725 Q59.2@5696.26,725 Q58.2@6680.51,725 7086.61,725 7086.61,664.37 7137.01,613.98 7208.27,613.98 7258.66,664.37 7258.66,725 Q57.2@7664.76,725 ; Q56.2@775,1709.25 1181.1,1709.25 1181.1,1648.62 1231.49,1598.23 1302.76,1598.23 1353.15,1648.62 1353.15,1709.25 Q55.2@1759.25,1709.25 Q54.2@2743.5,1709.25 3149.61,1709.25 3149.61,1648.62 3200,1598.23 3271.26,1598.23 3321.65,1648.62 3321.65,1709.25 Q53.2@3727.76,1709.25 Q52.2@4712.01,1709.25 5118.11,1709.25 5118.11,1648.62 5168.5,1598.23 5239.77,1598.23 5290.16,1648.62 5290.16,1709.25 Q51.2@5696.26,1709.25 Q50.2@6680.51,1709.25 7086.61,1709.25 7086.61,1648.62 7137.01,1598.23 7208.27,1598.23 7258.66,1648.62 7258.66,1709.25 Q49.2@7664.76,1709.25 ; Q48.2@775,2693.5 1181.1,2693.5 1181.1,2632.87 1231.49,2582.48 1302.76,2582.48 1353.15,2632.87 1353.15,2693.5 Q47.2@1759.25,2693.5 Q46.2@2743.5,2693.5 3149.61,2693.5 3149.61,2632.87 3200,2582.48 3271.26,2582.48 3321.65,2632.87 3321.65,2693.5 Q45.2@3727.76,2693.5 Q44.2@4712.01,2693.5 5118.11,2693.5 5118.11,2632.87 5168.5,2582.48 5239.77,2582.48 5290.16,2632.87 5290.16,2693.5 Q43.2@5696.26,2693.5 Q42.2@6680.51,2693.5 7086.61,2693.5 7086.61,2632.87 7137.01,2582.48 7208.27,2582.48 7258.66,2632.87 7258.66,2693.5 Q41.2@7664.76,2693.5 ; Q40.2@775,3677.76 1181.1,3677.76 1181.1,3617.12 1231.49,3566.73 1302.76,3566.73 1353.15,3617.12 1353.15,3677.76 Q39.2@1759.25,3677.76 Q38.2@2743.5,3677.76 3149.61,3677.76 3149.61,3617.12 3200,3566.73 3271.26,3566.73 3321.65,3617.12 3321.65,3677.76 Q37.2@3727.76,3677.76 Q36.2@4712.01,3677.76 5118.11,3677.76 5118.11,3617.12 5168.5,3566.73 5239.77,3566.73 5290.16,3617.12 5290.16,3677.76 Q35.2@5696.26,3677.76 Q34.2@6680.51,3677.76 7086.61,3677.76 7086.61,3617.12 7137.01,3566.73 7208.27,3566.73 7258.66,3617.12 7258.66,3677.76 Q33.2@7664.76,3677.76 ; Q32.2@775,4662.01 1181.1,4662.01 1181.1,4601.38 1231.49,4550.98 1302.76,4550.98 1353.15,4601.38 1353.15,4661.15 1354.01,4662.01 Q31.2@1759.25,4662.01 Q30.2@2743.5,4662.01 3149.61,4662.01 3149.61,4601.38 3200,4550.98 3271.26,4550.98 3321.65,4601.38 3321.65,4662.01 Q29.2@3727.76,4662.01 Q28.2@4712.01,4662.01 5118.11,4662.01 5118.11,4601.38 5168.5,4550.98 5239.77,4550.98 5290.16,4601.38 5290.16,4662.01 Q27.2@5696.26,4662.01 Q26.2@6680.51,4662.01 7086.61,4662.01 7086.61,4601.38 7137.01,4550.98 7208.27,4550.98 7258.66,4601.38 7258.66,4662.01 Q25.2@7664.76,4662.01 ; Q24.2@775,5646.26 1181.1,5646.26 1181.1,5585.63 1231.49,5535.24 1302.76,5535.24 1353.15,5585.63 1353.15,5646.26 Q23.2@1759.25,5646.26 Q22.2@2743.5,5646.26 3149.61,5646.26 3149.61,5585.63 3200,5535.24 3271.26,5535.24 3321.65,5585.63 3321.65,5646.26 Q21.2@3727.76,5646.26 Q20.2@4712.01,5646.26 5118.11,5646.26 5118.11,5585.63 5168.5,5535.24 5239.77,5535.24 5290.16,5585.63 5290.16,5646.26 Q19.2@5696.26,5646.26 Q18.2@6680.51,5646.26 7086.61,5646.26 7086.61,5585.63 7137.01,5535.24 7208.27,5535.24 7258.66,5585.63 7258.66,5646.26 Q17.2@7664.76,5646.26 ; Q16.2@775,6630.51 1181.1,6630.51 1181.1,6569.88 1231.49,6519.49 1302.76,6519.49 1353.15,6569.88 1353.15,6630.51 Q15.2@1759.25,6630.51 Q14.2@2743.5,6630.51 3149.61,6630.51 3149.61,6569.88 3200,6519.49 3271.26,6519.49 3321.65,6569.88 3321.65,6630.51 Q13.2@3727.76,6630.51 Q12.2@4712.01,6630.51 5118.11,6630.51 5118.11,6569.88 5168.5,6519.49 5239.77,6519.49 5290.16,6569.88 5290.16,6630.51 Q11.2@5696.26,6630.51 Q10.2@6680.51,6630.51 7086.61,6630.51 7086.61,6569.88 7137.01,6519.49 7208.27,6519.49 7258.66,6569.88 7258.66,6630.51 Q9.2@7664.76,6630.51 ; Q8.2@775,7614.76 1181.1,7614.76 1181.1,7554.13 1231.49,7503.74 1302.76,7503.74 1353.15,7554.13 1353.15,7614.76 Q7.2@1759.25,7614.76 Q6.2@2743.5,7614.76 3149.61,7614.76 3149.61,7554.13 3200,7503.74 3271.26,7503.74 3321.65,7554.13 3321.65,7614.76 Q5.2@3727.76,7614.76 Q4.2@4712.01,7614.76 5118.11,7614.76 5118.11,7554.13 5168.5,7503.74 5239.77,7503.74 5290.16,7554.13 5290.16,7614.76 Q3.2@5696.26,7614.76 Q2.2@6680.51,7614.76 7086.61,7614.76 7086.61,7554.13 7137.01,7503.74 7208.27,7503.74 7258.66,7554.13 7258.66,7614.76 Q1.2@7664.76,7614.76
  Bottom Layer w30: v1(4305.91,725) 4305.91,7875.91 4455,8025 6175,8025 T2.3@6425,8275
  other v1: 4305.91,1709.25 4305.91,2693.5 4305.91,3677.76 4305.91,4662.01 4305.91,5646.26 4305.91,6630.51 4305.91,7614.76
NetQ1_3: Q1.3 Q2.3 Q3.3 Q4.3 Q5.3 Q6.3 Q7.3 Q8.3 Q9.3 Q10.3 Q11.3 Q12.3 Q13.3 Q14.3 Q15.3 Q16.3 Q17.3 Q18.3 Q19.3 Q20.3 Q21.3 Q22.3 Q23.3 Q24.3 Q25.3 Q26.3 Q27.3 Q28.3 Q29.3 Q30.3 Q31.3 Q32.3 Q33.3 Q34.3 Q35.3 Q36.3 Q37.3 Q38.3 Q39.3 Q40.3 Q41.3 Q42.3 Q43.3 Q44.3 Q45.3 Q46.3 Q47.3 Q48.3 Q49.3 Q50.3 Q51.3 Q52.3 Q53.3 Q54.3 Q55.3 Q56.3 Q57.3 Q58.3 Q59.3 Q60.3 Q61.3 Q62.3 Q63.3 Q64.3 T3.3 | length 63826
  Top Layer w30: Q64.3@775,775 1220.47,775 1231.49,786.02 1302.76,786.02 1313.78,775 Q63.3@1759.25,775 Q62.3@2743.5,775 3188.97,775 3200,786.02 3271.26,786.02 3282.29,775 Q61.3@3727.76,775 Q60.3@4712.01,775 5157.48,775 5168.5,786.02 5239.77,786.02 5250.79,775 Q59.3@5696.26,775 Q58.3@6680.51,775 7125.98,775 7137.01,786.02 7208.27,786.02 7219.29,775 Q57.3@7664.76,775 ; Q56.3@775,1759.25 1220.47,1759.25 1231.49,1770.28 1302.76,1770.28 1313.78,1759.25 Q55.3@1759.25,1759.25 Q54.3@2743.5,1759.25 3188.97,1759.25 3200,1770.28 3271.26,1770.28 3282.29,1759.25 Q53.3@3727.76,1759.25 Q52.3@4712.01,1759.25 5157.48,1759.25 5168.5,1770.28 5239.77,1770.28 5250.79,1759.25 Q51.3@5696.26,1759.25 Q50.3@6680.51,1759.25 7125.98,1759.25 7137.01,1770.28 7208.27,1770.28 7219.29,1759.25 Q49.3@7664.76,1759.25 ; Q48.3@775,2743.5 1220.47,2743.5 1231.49,2754.53 1302.76,2754.53 1313.78,2743.5 Q47.3@1759.25,2743.5 Q46.3@2743.5,2743.5 3188.97,2743.5 3200,2754.53 3271.26,2754.53 3282.29,2743.5 Q45.3@3727.76,2743.5 Q44.3@4712.01,2743.5 5157.48,2743.5 5168.5,2754.53 5239.77,2754.53 5250.79,2743.5 Q43.3@5696.26,2743.5 Q42.3@6680.51,2743.5 7125.98,2743.5 7137.01,2754.53 7208.27,2754.53 7219.29,2743.5 Q41.3@7664.76,2743.5 ; Q40.3@775,3727.76 1220.47,3727.76 1231.49,3738.78 1302.76,3738.78 1313.78,3727.76 Q39.3@1759.25,3727.76 Q38.3@2743.5,3727.76 3188.97,3727.76 3200,3738.78 3271.26,3738.78 3282.29,3727.76 Q37.3@3727.76,3727.76 Q36.3@4712.01,3727.76 5157.48,3727.76 5168.5,3738.78 5239.77,3738.78 5250.79,3727.76 Q35.3@5696.26,3727.76 Q34.3@6680.51,3727.76 7125.98,3727.76 7137.01,3738.78 7208.27,3738.78 7219.29,3727.76 Q33.3@7664.76,3727.76 ; Q32.3@775,4712.01 1220.47,4712.01 1231.49,4723.03 1302.76,4723.03 1313.78,4712.01 Q31.3@1759.25,4712.01 Q30.3@2743.5,4712.01 3188.97,4712.01 3200,4723.03 3271.26,4723.03 3282.29,4712.01 Q29.3@3727.76,4712.01 Q28.3@4712.01,4712.01 5157.48,4712.01 5168.5,4723.03 5239.77,4723.03 5250.79,4712.01 Q27.3@5696.26,4712.01 Q26.3@6680.51,4712.01 7125.98,4712.01 7137.01,4723.03 7208.27,4723.03 7219.29,4712.01 Q25.3@7664.76,4712.01 ; Q24.3@775,5696.26 1220.47,5696.26 1231.49,5707.28 1302.76,5707.28 1313.78,5696.26 Q23.3@1759.25,5696.26 Q22.3@2743.5,5696.26 3188.97,5696.26 3200,5707.28 3271.26,5707.28 3282.29,5696.26 Q21.3@3727.76,5696.26 Q20.3@4712.01,5696.26 5157.48,5696.26 5168.5,5707.28 5239.77,5707.28 5250.79,5696.26 Q19.3@5696.26,5696.26 Q18.3@6680.51,5696.26 7125.98,5696.26 7137.01,5707.28 7208.27,5707.28 7219.29,5696.26 Q17.3@7664.76,5696.26 ; Q16.3@775,6680.51 1220.47,6680.51 1231.49,6691.54 1302.76,6691.54 1313.78,6680.51 Q15.3@1759.25,6680.51 Q14.3@2743.5,6680.51 3188.97,6680.51 3200,6691.54 3271.26,6691.54 3282.29,6680.51 Q13.3@3727.76,6680.51 Q12.3@4712.01,6680.51 5157.48,6680.51 5168.5,6691.54 5239.77,6691.54 5250.79,6680.51 Q11.3@5696.26,6680.51 Q10.3@6680.51,6680.51 7125.98,6680.51 7137.01,6691.54 7208.27,6691.54 7219.29,6680.51 Q9.3@7664.76,6680.51 ; Q8.3@775,7664.76 1220.47,7664.76 1231.49,7675.79 1302.76,7675.79 1313.78,7664.76 Q7.3@1759.25,7664.76 Q6.3@2743.5,7664.76 3188.97,7664.76 3200,7675.79 3271.26,7675.79 3282.29,7664.76 Q5.3@3727.76,7664.76 Q4.3@4712.01,7664.76 5157.48,7664.76 5168.5,7675.79 5239.77,7675.79 5250.79,7664.76 Q3.3@5696.26,7664.76 Q2.3@6680.51,7664.76 7125.98,7664.76 7137.01,7675.79 7208.27,7675.79 7219.29,7664.76 Q1.3@7664.76,7664.76
  Bottom Layer w30: v1(6275,775) 6275,7875 6675,8275 T3.3@7425,8275
  other v1: 6275,1759.25 6275,2743.5 6275,3727.76 6275,4712.01 6275,5696.26 6275,6680.51 6275,7664.76
NetR1_2: R1.2 T1.2 | length 332.8
  Top Layer w30: T1.2@5425,8325 5475,8325 R1.2@5675,8125
NetR2_2: R2.2 T2.2 | length 332.8
  Top Layer w30: T2.2@6425,8325 6475,8325 R2.2@6675,8125
NetR3_2: R3.2 T3.2 | length 332.8
  Top Layer w30: T3.2@7425,8325 7475,8325 R3.2@7675,8125
RED: P1.2 R1.1 | length 1124.5
  Top Layer w30: P1.2@4575,8375 4580.59,8375 4635.12,8429.53 5670.47,8429.53 R1.1@5675,8425
SCLK: 1.25 2.25 3.25 4.25 P1.8 | length 11874.4
  Top Layer w20: v2(8325,1350) 4.25@8425,1350 ; v2(8325,3315) 3.25@8425,3315 ; v2(8325,5285) 2.25@8425,5285 ; v2(8325,7255) 1.25@8425,7255
  Bottom Layer w20: P1.8@3975,8375 4155,8555 8060.15,8555 8325,8290.15 v2(8325,1350)
SIN: 1.26 P1.9 | length 5660.5
  Bottom Layer w20: P1.9@3875,8375 4085,8585 8072.57,8585 8375,8282.57 8375,7405 1.26@8425,7355
VCC: 1.21 2.21 3.21 4.21 C2.1 C3.1 C4.1 C5.1 P1.1 R8.1 T1.1 T2.1 T3.1 | length 12552.4
  Top Layer w30: P1.1@4675,8375 T1.1@5425,8375 5427.56,8372.44 T3.1@7422.44,8372.44 ; T3.1@7425,8375 7499.33,8375 8067.52,7806.81 8067.52,7806.19 8101.19,7772.52 8101.81,7772.52 8125,7749.33 C2.1@8125,7730 v1(8525,7730) ; C5.1@8125,1825 v1(8525,1825) ; C4.1@8125,3789 v1(8525,3789) ; C3.1@8125,5760 v1(8525,5760) ; 4.21@8425,950 v1(8525,950) ; 3.21@8425,2915 v1(8525,2915) ; 2.21@8425,4885 v1(8525,4885) ; 1.21@8425,6855 v1(8525,6855)
  Bottom Layer w30: v1(8525,950) v1(8525,1825) v1(8525,2915) v1(8525,3789) v1(8525,4885) v1(8525,5760) 8525,5765 8525,6625.07 ; v1@8525,6860 8525,6625.07 ; 8525,6880 v1(8525,7730) ; R8.1@8590,6625.07 8525,6625.07
VPRG: 1.27 2.27 3.27 4.27 P1.10 | length 11836
  Bottom Layer w20: P1.10@3775,8375 4015,8615 8085,8615 8475,8225 8475,5485 ; 4.27@8425,1550 8475,1550 8475,3515 ; 3.27@8425,3515 8475,3515 ; 2.27@8425,5485 8475,5485 ; 1.27@8425,7455 8475,7455 ; 8475,3515 8475,5485
XLAT: 1.24 2.24 3.24 4.24 P1.7 | length 12065.2
  Top Layer w20: P1.7@4075,8375 4315,8615 7935,8615 v2(8275,8275) ; v2(8275,1250) 4.24@8425,1250 ; v2(8275,3215) 3.24@8425,3215 ; v2(8275,5185) 2.24@8425,5185 ; v2(8275,7155) 1.24@8425,7155
  Bottom Layer w20: v2(8275,1250) v2(8275,8275)
pads on no net: 1.16 2.16 3.16 4.16 4.17 P1.20

## Keep-outs
Keep-Out Layer:
  lines w10: 0,0 0,8650 8650,8650 8650,0 0,0

## Silkscreen, mask and mechanical layers (free items; w line width, h text height)
Top Overlay:
  lines w11.81: 7605,504 7605,569 ; 7565,503 7565,569 7680,569 7680,503 7565,503
  text "Chronome V2.1 by Owen Vallis 2010" at 775,8415 h60
  text "GND" at 4760,8240 h50

## Text inside footprints (layer, text, board x,y; h text height)
P1: Top Overlay "5V" at 4760,8360 h50
T1: Top Overlay "1" at 5320.28,8399.8 h59.05 r180; Top Overlay "3" at 5329.33,8304.92 h59.05 r180
T2: Top Overlay "1" at 6320.28,8399.8 h59.05 r180; Top Overlay "3" at 6329.33,8304.92 h59.05 r180
T3: Top Overlay "1" at 7320.28,8399.8 h59.05 r180; Top Overlay "3" at 7329.33,8304.92 h59.05 r180